# EAGLE board tip41c-li-iron-charger-v0 (EAGLE 5.07)
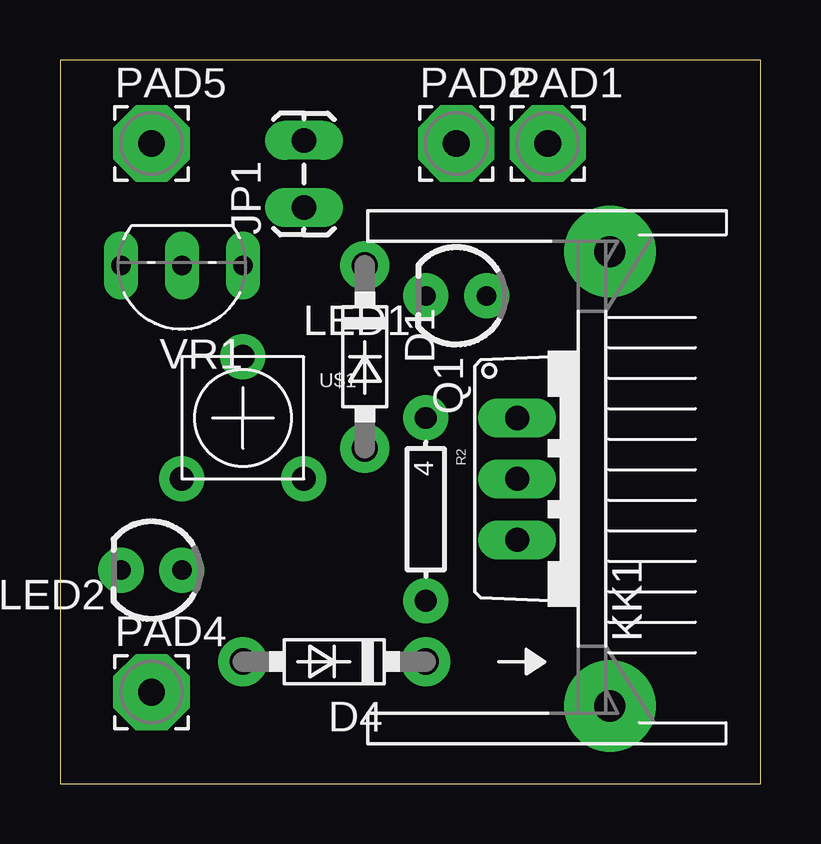
[diagram p0: board, top side]
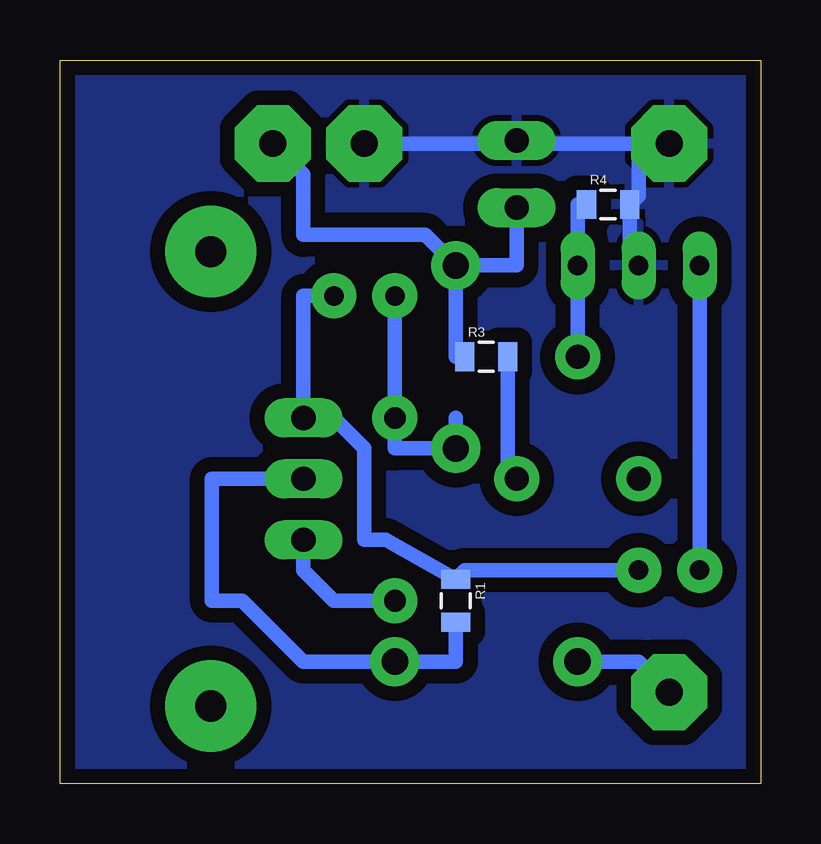
[diagram p1: board, bottom side, seen from below]

Size 29.19 x 30.15 mm. Coordinates in mm from the lower left corner, seen from the top.
Outline: 0,0 29.19,0 29.19,30.15 0,30.15 0,0
Copper layers (1*16): Top 0.035mm / dielectric 1.5mm / Bottom 0.035mm
Design rules "SparkFun": minimum track width 8mil, minimum drill 20mil, track to track 8mil, track to pad 8mil, pad to pad 8mil, via to via 8mil, smd to smd 8mil, copper to edge 10mil, drill to drill 8mil, minimum pad ring 12mil, minimum via ring 10mil, stop-mask expansion 4mil, vias tented up to drill 25mil, thermal gap 10mil

## Footprints (pad centres in the part's own frame; a part is rotated, then mirrored left to right if it is on the bottom)
DO41-7.6 = drill 1.1 pad 2.032 round: A 3.81,0; C -3.81,0
1X02_LOCK_LONGPADS = drill 1.016 long: 1 -0.127,0; 2 2.667,0
DTOY-HEATSINK-24MMX16MM = drill 1.3 pad 3.81 round: A2,2 -9.465,-1.32; B2,2 9.465,-1.32
LED3MM = drill 0.813 pad 1.88 round: A -1.27,0; K 1.27,0
3,17/1,1 = drill 1.118 pad 3.175 octagon: 1 0,0
TO220AV = drill 1.016 long: B -2.54,-2.54; C 0,-2.54; E 2.54,-2.54
0805 = smd 0.8 x 1.2: 1 -0.9,0; 2 0.9,0
AXIAL-0.3 = drill 0.9 pad 1.88 round: P$1 -3.81,0; P$2 3.81,0
TRIM_POT_PTH = drill 1 pad 1.88 round: 1 -2.54,-2.54; 2 0,2.54; 3 2.54,-2.54
TO92-RAC = drill 0.813 long: A 2.54,0; C 5.08,0; R 0,0

## Placement (x,y rotation side)
D1  1N5819-B  [DO41-7.6]  12.7,17.78 270 top
D4  1N5819-B  [DO41-7.6]  11.43,5.08 180 top
JP1  [1X02_LOCK_LONGPADS]  10.16,24.13 90 top
KK1  HEAT-SINK  [DTOY-HEATSINK-24MMX16MM]  21.59,12.7 90 top
LED1  red  [LED3MM]  16.51,20.32 180 top
LED2  Green  [LED3MM]  3.81,8.89 180 top
PAD1  BAT+  [3,17/1,1]  20.32,26.67 0 top
PAD2  BAT-  [3,17/1,1]  16.51,26.67 0 top
PAD4  CHR+  [3,17/1,1]  3.81,3.81 0 top
PAD5  CHR-  [3,17/1,1]  3.81,26.67 0 top
Q1  TIP41C  [TO220AV]  21.59,12.7 270 top
R1  1k  [0805]  12.7,7.62 270 bottom
R2  4  [AXIAL-0.3]  15.24,11.43 270 top
R3  7.5k  [0805]  11.43,17.78 0 bottom
R4  10k  [0805]  6.35,24.13 0 bottom
U$1  POT-1k  [TRIM_POT_PTH]  7.62,15.24 0 top
VR1  TL431  [TO92-RAC]  7.62,21.59 180 top

## Library data of the parts
D1 D4 KK1 LED1 LED2 R1-R4 VR1 = digital-toy
JP1 U$1 = SparkFun
PAD1 PAD2 PAD4 PAD5 = wirepad
Q1 = transistor-power

## Nets
GND: JP1.2 PAD2.1 PAD5.1 R4.2 VR1.A
N$1: Q1.E R2.P$2
N$2: LED2.K VR1.C
N$3: LED1.A LED2.A Q1.B R1.1
N$4: D1.A LED1.K R2.P$1
N$5: R4.1 U$1.2 VR1.R
N$6: R3.2 U$1.3
N$7: D1.C JP1.1 PAD1.1 R3.1
N$13: D4.A PAD4.1
VCC: D4.C Q1.C R1.2

## Tracks (layer width: path | path; a pad name or v marks a point on that pad's centre or on a via)
GND
  Bottom 0.254: 5.08,26.67 PAD5.1 | PAD2.1 10.03,26.67 JP1.2
  Bottom 0.61: 5.08,26.67 5.08,24.5 R4.2 5.45,21.96 VR1.A | PAD5.1 PAD2.1
  pour Bottom (isolate 0.61): -1.27,31.75 33.02,31.75 33.02,-1.27 31.75,-2.54 -3.81,-2.54 -3.81,29.21
N$1
  Bottom 0.61: R2.P$2 17.78,7.62 19.05,8.89 Q1.E
N$2
  Bottom 0.61: LED2.K VR1.C
N$3
  Bottom 0.61: LED1.A 19.05,20.32 Q1.B 17.78,15.24 16.51,13.97 16.51,10.16 15.61,10.16 R1.1 12.33,8.89 LED2.A
N$4
  Bottom 0.61: 12.7,15.24 D1.A 15.24,13.97 R2.P$1 LED1.K
N$5
  Bottom 0.61: R4.1 7.62,24.13 VR1.R U$1.2
N$6
  Bottom 0.61: U$1.3 10.53,12.7 R3.2
N$7
  Bottom 0.61: JP1.1 10.16,21.59 D1.C | D1.C 13.97,22.86 19.05,22.86 19.05,25.4 PAD1.1 | D1.C 12.7,17.78 R3.1
N$13
  Bottom 0.61: PAD4.1 5.08,5.08 D4.A
VCC
  Bottom 0.61: R1.2 12.7,5.08 D4.C 19.05,5.08 21.59,7.62 22.86,7.62 22.86,12.7 Q1.C